# Altium PCB Tx.PcbDoc
Units mil, origin at the board's own origin, x right, y up, seen from the top; angles counter-clockwise.
Board outline 9027.66 x 4700 mil, 2 copper layers (Top Layer, Bottom Layer); 5 components, 16 nets, 58 pads, 10 vias.
Unrouted connection lines stored in the file: 1.
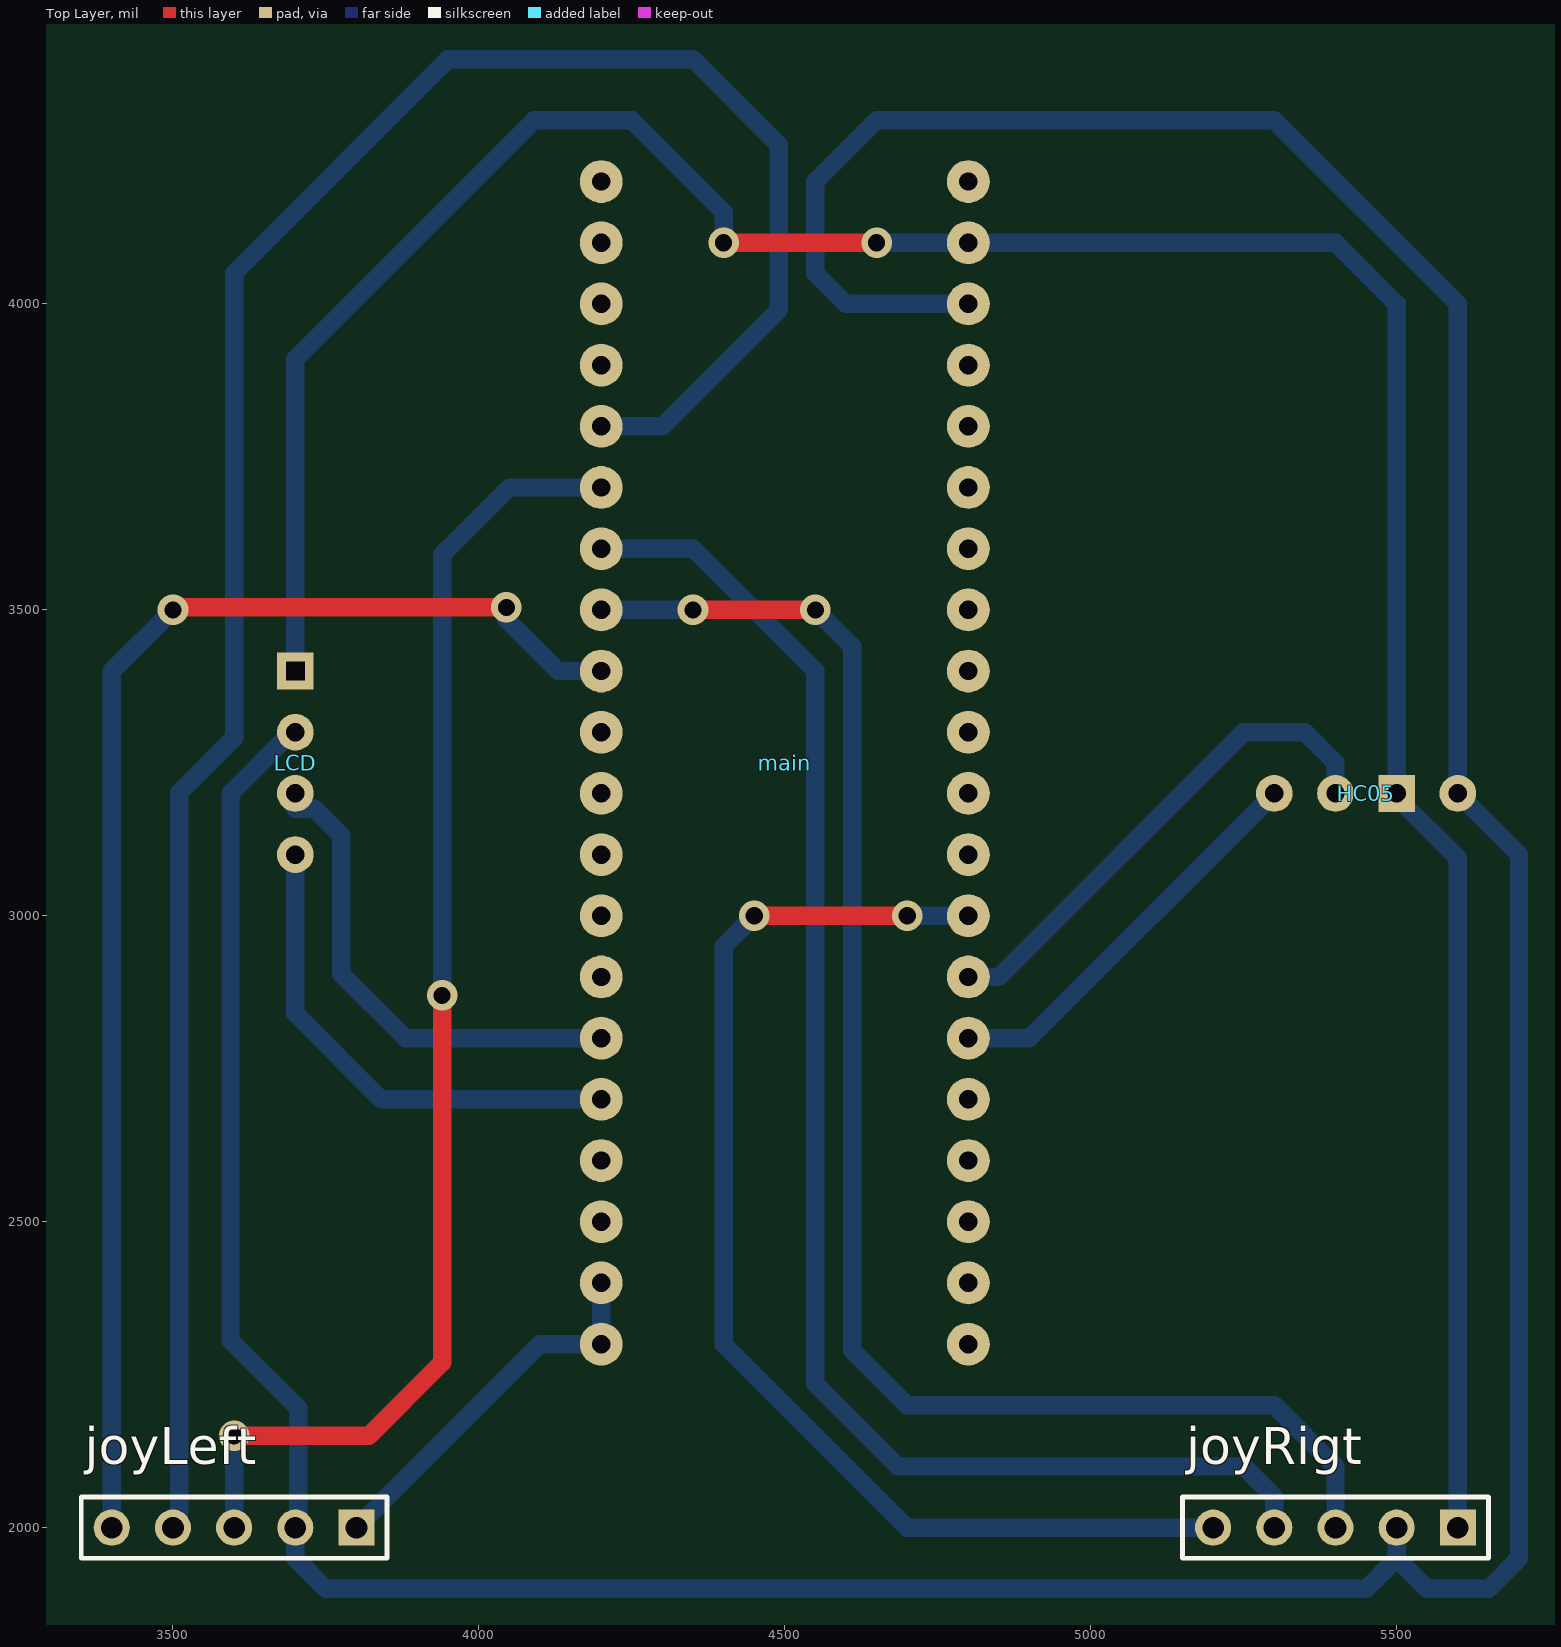
[diagram p0: Top Layer view]
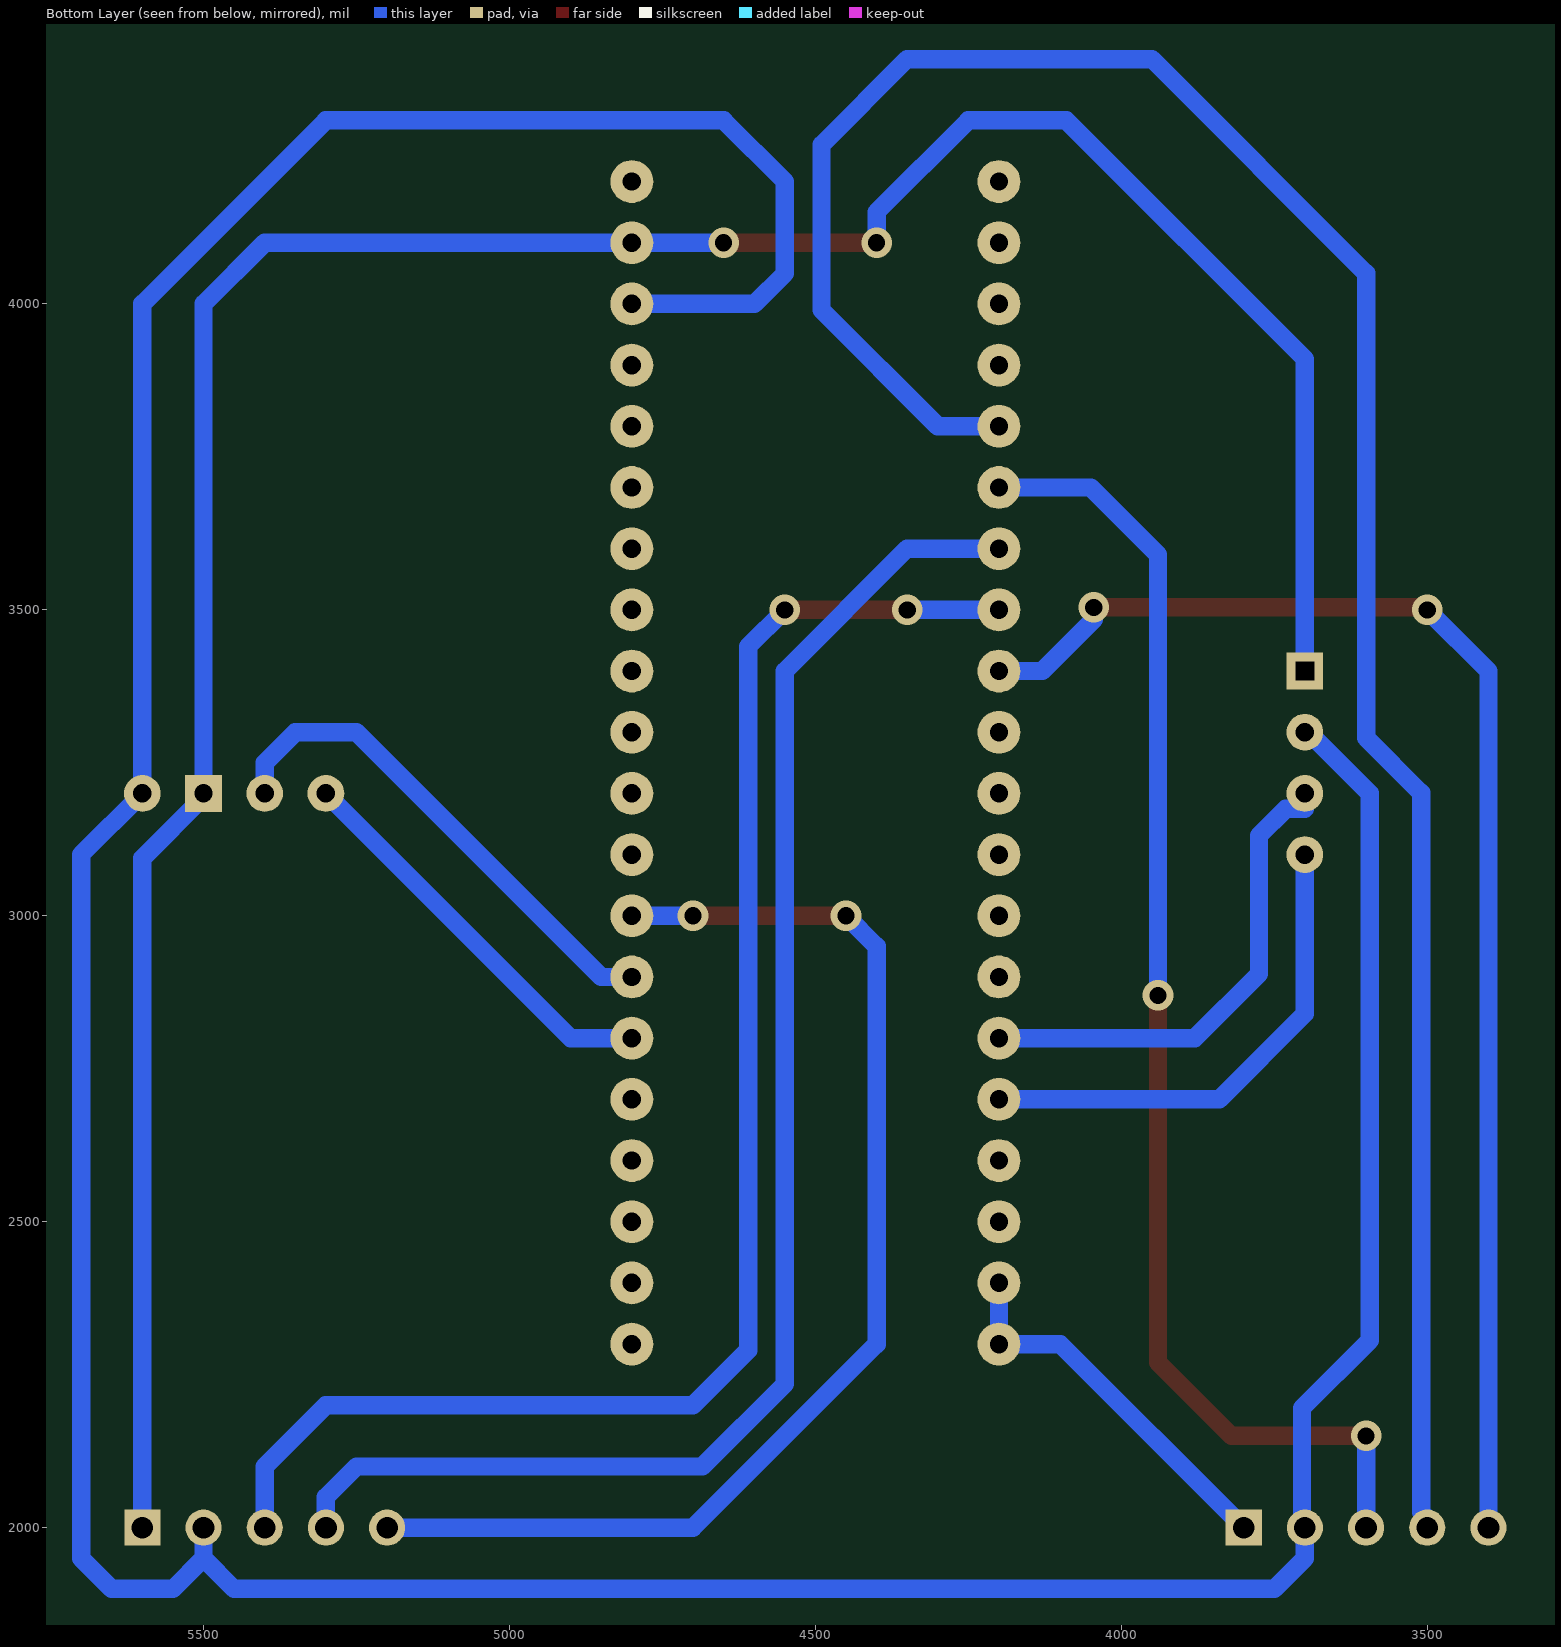
[diagram p1: Bottom Layer view, seen from below]
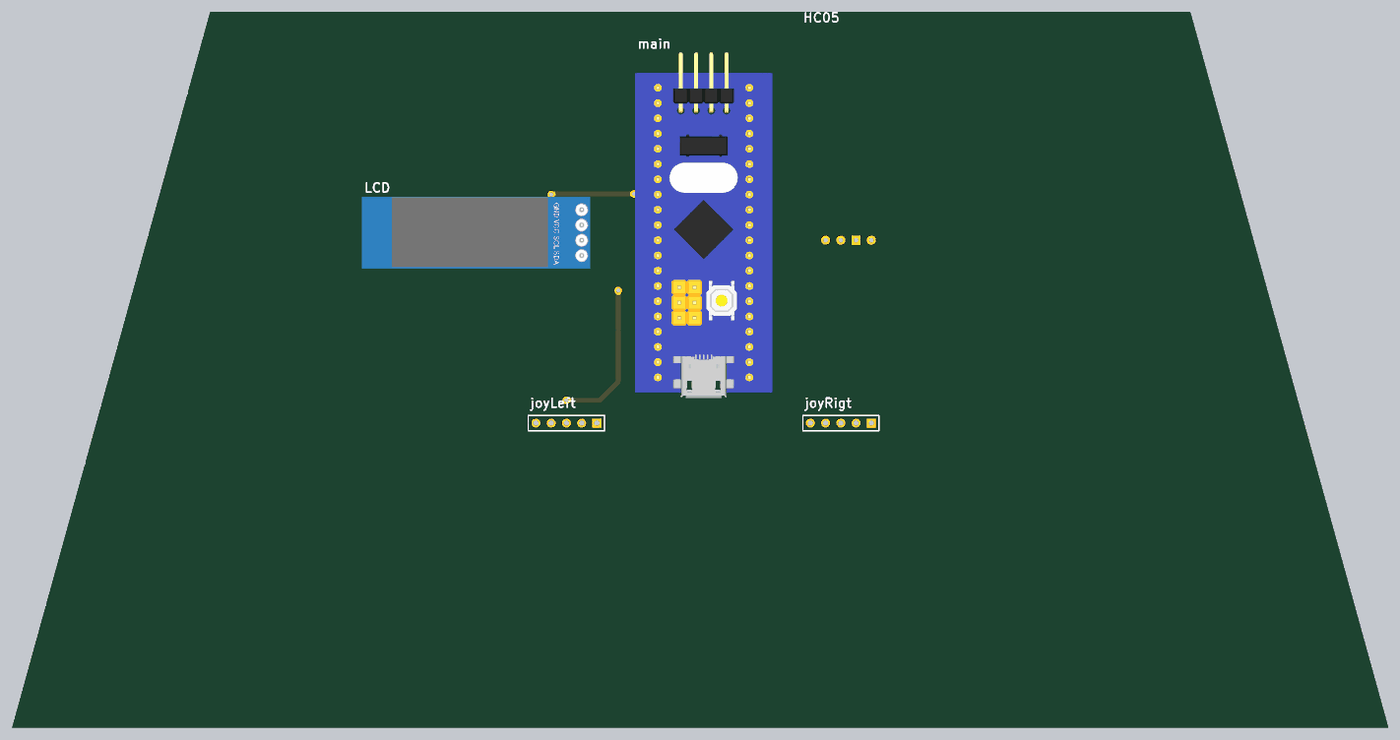
[diagram p2: 3D render of the assembled board from above, using the file's embedded part models]

## Layer stack, top to bottom
Top Solder: solder mask 0.4, Solder Resist, Dk 3.5
Top Layer: signal copper 1.4
Dielectric 1: dielectric 12.6, FR-4, Dk 4.8
Bottom Layer: signal copper 1.4
Bottom Solder: solder mask 0.4, Solder Resist, Dk 3.5

## Board outline
-36.17,0 8991.49,0 7691.49,4700 1263.83,4700

## Design rules (kind name [scope] priority, off if disabled: settings)
Clearance [All] p1: gap=30 ignorepadtopadclearanceinfootprint=FALSE
PolygonConnect [All] p1: connectstyle=Relief reliefconductorwidth=10 reliefentries=4 polygonreliefangle="90 Angle" airgapwidth=10
RoutingVias [All] p1: holewidth=28 width=50 viastyle="Through Hole" minholewidth=28 minwidth=50 maxholewidth=28 maxwidth=50
SolderMaskExpansion [All] p1: expansion=4
Width [All] p1: maxlimit=60 minlimit=30 preferedwidth=40
30 further rules are at their usual default settings.

## Components (designator, comment, footprint, x,y, rotation, side; value= is the part's Value field where it differs from the comment)
HC05 "HC05" HC05 5300,3200 r0 top
joyLeft "Header 5" HDR1X5 3800,2000 r180 top
joyRigt "Header 5" HDR1X5 5600,2000 r180 top
LCD "OLED 0.91\"" "OLED 0.91\"" 3700,3400 r0 top
main "F103C8_BluePill" F103_BluePill 4800,2300 r180 top

## Footprints (in the part's own frame and the unit in brackets; to place one, negate y for a bottom-side part, rotate by r counter-clockwise, add the part's x,y. Pads: shape width x height; smd on the part's side, far side on the other; paste and mask are expansions set on the pad)
F103_BluePill [mil]
  round 70 hole 30: 3.3_1(0,-1900) 3.3_2(600,-200) 5V(0,-1700) A0(600,-1500) A1(600,-1400) A2(600,-1300) A3(600,-1200) A4(600,-1100) A5(600,-1000) A6(600,-900) A7(600,-800) A8(0,-400) A9(0,-500) A10(0,-600) A11(0,-700) A12(0,-800) A15(0,-900) B0(600,-700) B1(600,-600) B3(0,-1000) B4(0,-1100) B5(0,-1200) B6(0,-1300) B7(0,-1400) B8(0,-1500) B9(0,-1600) B10(600,-500) B11(600,-400) B12(0,0) B13(0,-100) B14(0,-200) B15(0,-300) C13(600,-1800) C14(600,-1700) C15(600,-1600) G_1(0,-1800) G_2(600,-100) G_3(600,0) R(600,-300) VB(600,-1900)
  body extent -150,-2131 750,135, height 585
HC05 [mil]
  rect 60x60 hole 30: GND(200,0)
  round 60 hole 30: Rx(0,0) Tx(100,0) VCC(300,0)
  body extent -163,-275 467,1402, height 219
HDR1X5 [mm] "Connector; Header; 5 Position"
  rect 1.5x1.5 hole 0.9: 1(0,0)
  round 1.5 hole 0.9: 2(2.54,0) 3(5.08,0) 4(7.62,0) 5(10.16,0)
  silkscreen extent -1.27,-1.27 11.43,1.27
"OLED 0.91\"" [mil]
  rect 60x60 hole 30 square: GND(0,0)
  round 60 hole 30: SCL(0,-200) SDA(0,-300) VCC(0,-100)
  body extent -1441,-386 55,86, height 218

## Part data
joyLeft joyRigt: "Header, 5-Pin", LatestRevisionDate=17-Jul-2002, LatestRevisionNote="Re-released for DXP Platform.", Publisher="Altium Limited"

## Via types
v1: diameter 50, hole 28, Top Layer to Bottom Layer, 10 vias

## Nets (pads, with @x,y where several pads share a name; then routed paths per layer and width w, separated by ;. In a path a pad name is that pad's centre, name@x,y a point inside that pad or via, vN(x,y) a via of type N, cw(c..) or ccw(c..) an arc to the next point about the centre after c; other vN are vias at no path point)
5V: HC05.VCC joyLeft.2 joyRigt.2 LCD.VCC main.5V | length 7306
  Bottom Layer w30: LCD.VCC 3693.93,3300 3593.93,3200 3593.93,2306.07 3704.75,2195.25 3704.75,2004.75 joyLeft.2 3700,1950 3750,1900 5450,1900 5500,1950 ; main.5V 4600,4000 4550,4050 4550,4200 4650,4300 5300,4300 5600,4000 HC05.VCC 5700,3100 5700,1950 5650,1900 5550,1900 5500,1950 ; joyRigt.2 5500,1950
down: main.B4
GND: HC05.GND joyLeft.1 joyRigt.1 LCD.GND main.G_1 main.G_2 main.G_3 | length 5290.8
  Top Layer w30: v1(4400,4100) v1(4650,4100)
  Bottom Layer w30: LCD.GND 3700,3910 4090,4300 4250,4300 4400,4150 v1(4400,4100) ; joyLeft.1 4100,2300 main.G_3 main.G_2 ; v1(4650,4100) main.G_1 5400,4100 5500,4000 HC05.GND 5500,3193.93 5600,3093.93 joyRigt.1
HC05_Rx: HC05.Tx main.A10 | length 836.4
  Bottom Layer w30: main.A10 4850,2900 5250,3300 5350,3300 5400,3250 HC05.Tx
HC05_Tx: HC05.Rx main.A9 | length 665.7
  Bottom Layer w30: main.A9 4900,2800 HC05.Rx
joyLeft_But: joyLeft.5 main.A4 | length 2297.7
  Top Layer w30: v1(3500,3500) 3503.99,3503.99 v1(4045,3503.99)
  Bottom Layer w30: joyLeft.5 3400,3300 3400,3400 v1(3500,3500) ; v1(4045,3503.99) 4045,3484.29 4129.29,3400 main.A4
joyLeft_Hor: joyLeft.3 main.A1 | length 2165.3
  Top Layer w30: v1(3600,2150) 3820,2150 3940,2270 v1(3940,2870)
  Bottom Layer w30: joyLeft.3 v1(3600,2150) ; v1(3940,2870) 3940,3590 4050,3700 main.A1
joyLeft_Ver: joyLeft.4 main.A0 | length 3823.1
  Bottom Layer w30: joyLeft.4 3500,2015.15 3510,2025.15 3510,3200.92 3600,3290.92 3600,4050 3950,4400 4350,4400 4490,4260 4490,3990 4300,3800 main.A0
joyRigt_But: joyRigt.5 main.A11 | length 1995
  Top Layer w30: v1(4450,3000) v1(4700,3000)
  Bottom Layer w30: v1(4450,3000) 4400,2950 4400,2300 4700,2000 joyRigt.5 ; v1(4700,3000) main.A11
joyRigt_Hor: joyRigt.3 main.A3 | length 2553.6
  Top Layer w30: v1(4350,3500) v1(4550,3500)
  Bottom Layer w30: main.A3 v1(4350,3500) ; v1(4550,3500) 4610,3440 4610,2290 4700,2200 5300,2200 5400,2100 joyRigt.3
joyRigt_Ver: joyRigt.4 main.A2 | length 2474.6
  Bottom Layer w30: main.A2 4350,3600 4550,3400 4550,2234.85 4684.85,2100 5250,2100 5300,2050 joyRigt.4
LCD_SCL: LCD.SCL main.B10 | length 812.8
  Bottom Layer w30: LCD.SCL 3700,3175 3731.07,3175 3775,3131.07 3775,2905 3880,2800 main.B10
LCD_SDA: LCD.SDA main.B11 | length 818
  Bottom Layer w30: LCD.SDA 3700,2840 3840,2700 main.B11
left: main.A12
rigt: main.A15
up: main.B3
pads on no net: main.3.3_1 main.3.3_2 main.A5 main.A6 main.A7 main.A8 main.B0 main.B1 main.B5 main.B6 main.B7 main.B8 main.B9 main.B12 main.B13 main.B14 main.B15 main.C13 main.C14 main.C15 main.R main.VB